# Altium PCB LDC_Module.PcbDoc
Units mm, origin at the board's own origin, x right, y up, seen from the top; angles counter-clockwise.
Board outline 120 x 85 mm, 2 copper layers (Top Layer, Bottom Layer); 14 components, 37 nets, 117 pads, 107 vias.
Unrouted connection lines stored in the file: 35.
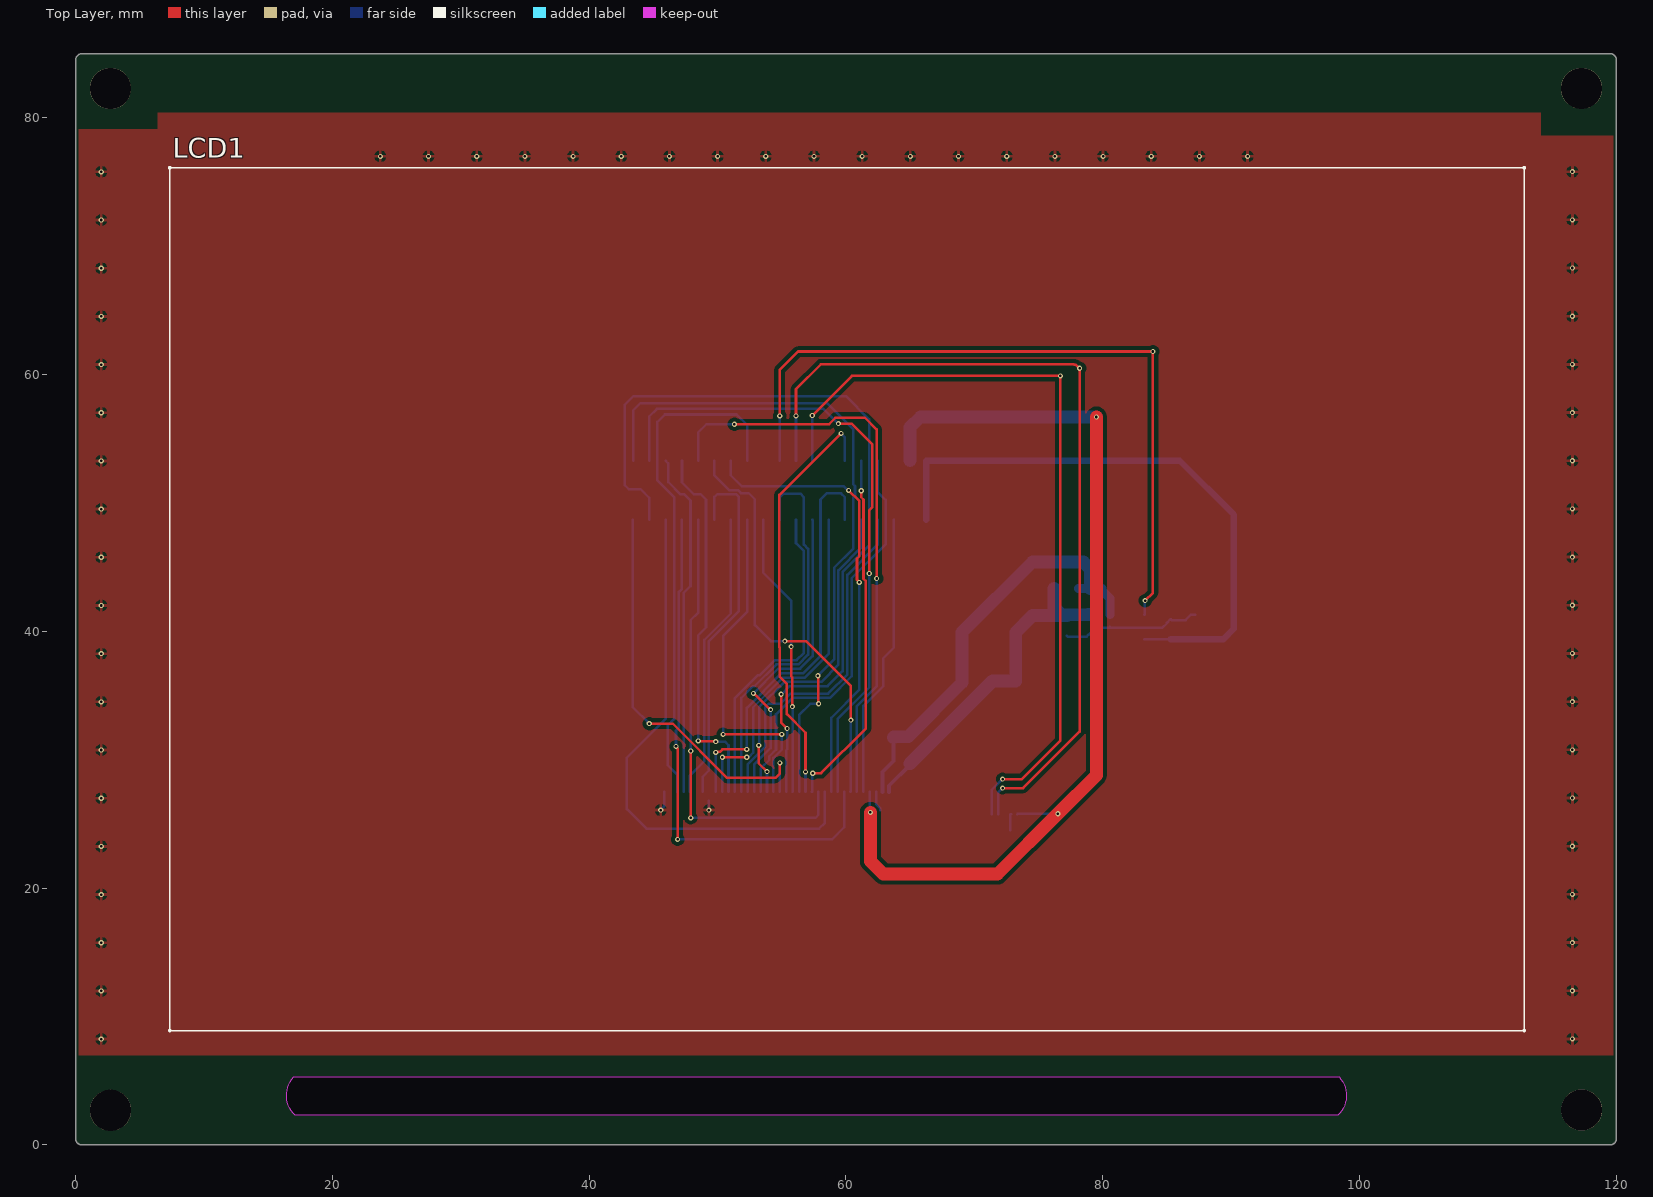
[diagram p0: Top Layer view]
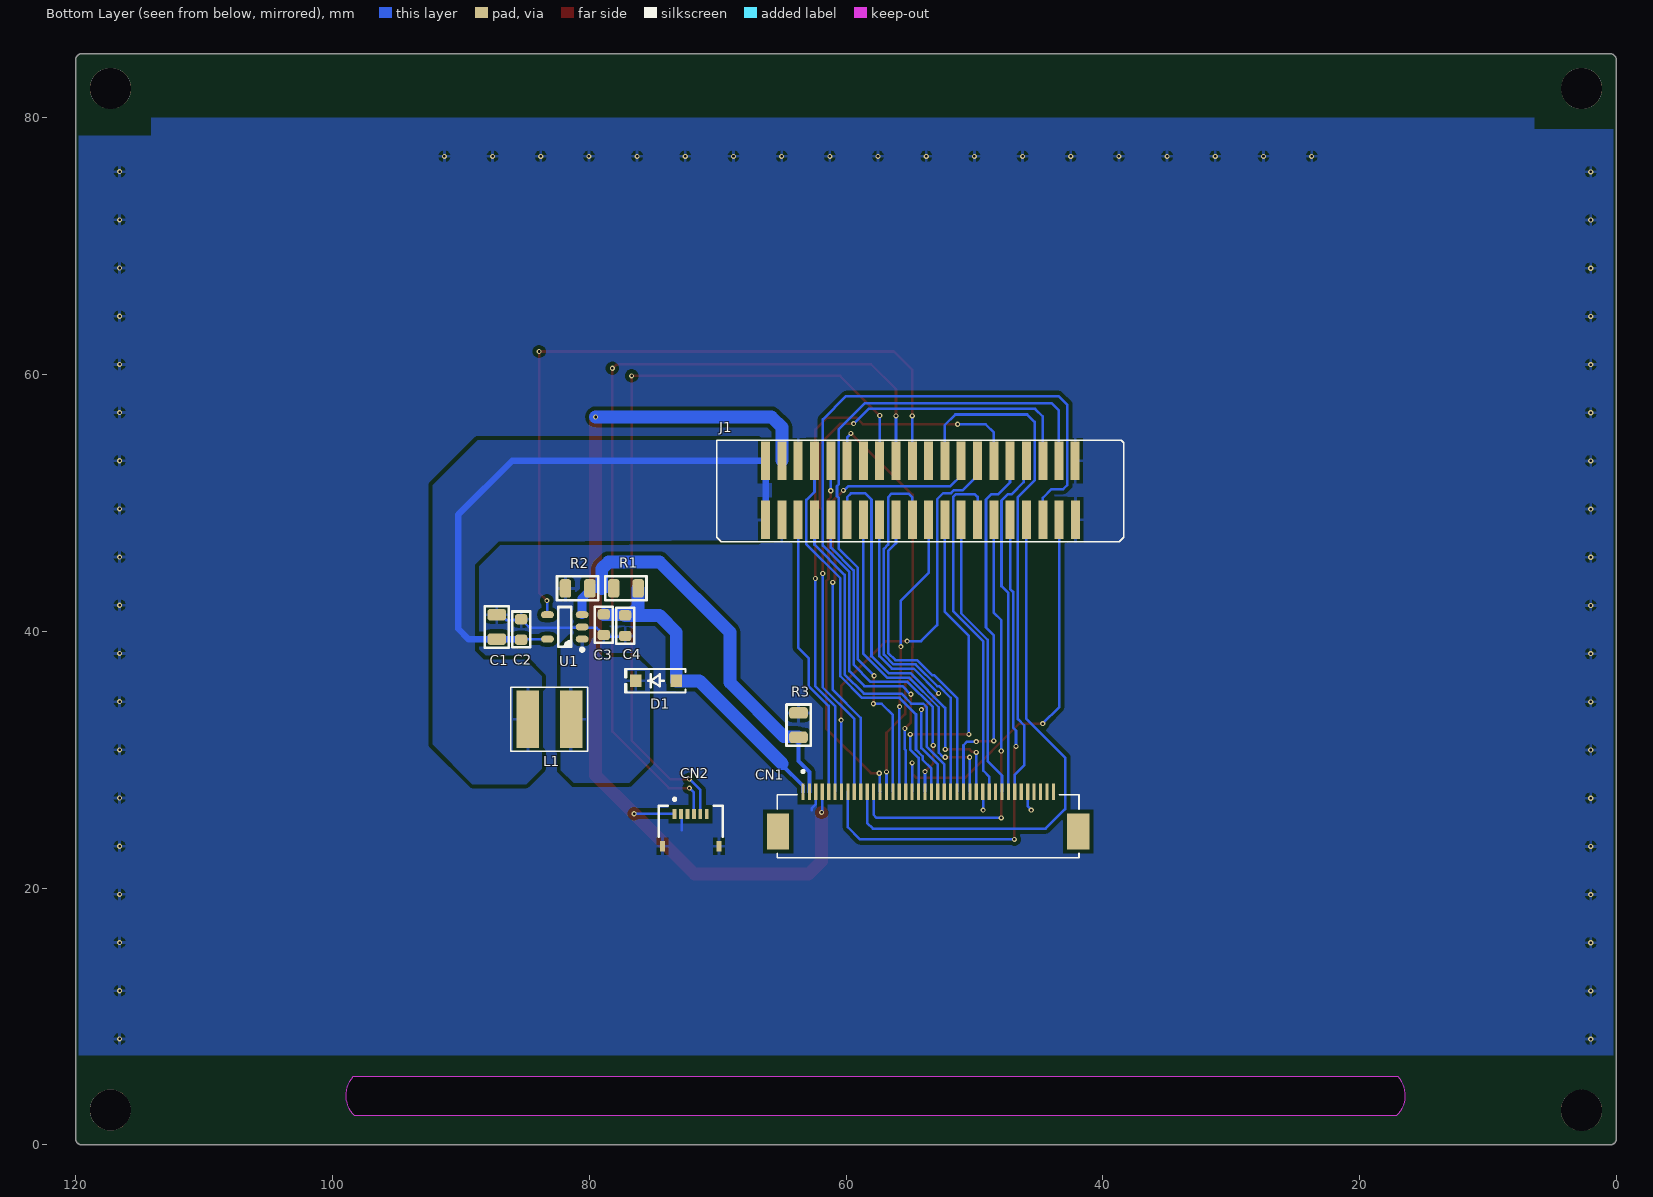
[diagram p1: Bottom Layer view, seen from below]
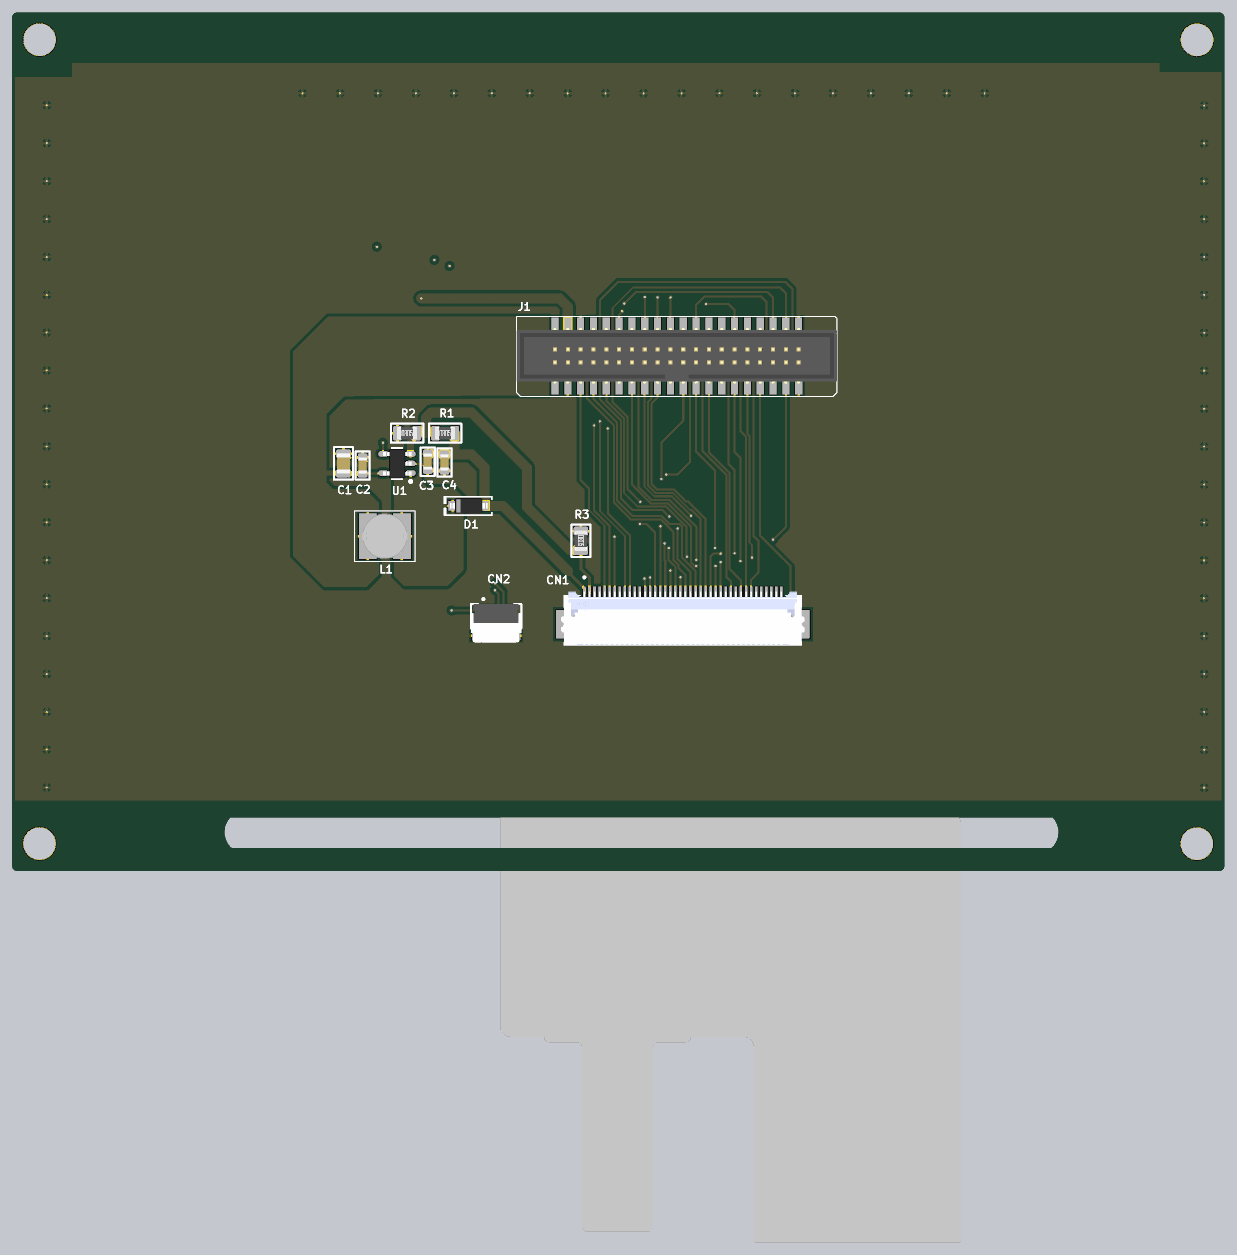
[diagram p2: 3D render of the assembled board from below, using the file's embedded part models]

## Layer stack, top to bottom
Top Solder: solder mask 0.0102, Solder Resist, Dk 3.5
Top Layer: signal copper 0.0356
Dielectric 1: dielectric 0.32, FR-4, Dk 4.8
Bottom Layer: signal copper 0.0356
Bottom Solder: solder mask 0.0102, Solder Resist, Dk 3.5

## Board outline
0,0.5 0,84.5 cw(c0.5,84.5) 0.5,85 119.5,85 cw(c119.5,84.5) 120,84.5 120,0.5 cw(c119.5,0.5) 119.5,0 0.5,0 cw(c0.5,0.5)
cut-out: 17.1,2.3 cw(c18.55,3.85) 17,5.3 98.4,5.3 cw(c96.85,3.85) 98.3,2.3

## Design rules (kind name [scope] priority, off if disabled: settings)
BoardOutlineClearance [All] p1: gap=0.254 ignorepadtopadclearanceinfootprint=FALSE except(0: Arc-SplitContinuation Track-SplitContinuation SMDPad-SplitContinuation THPad-SplitContinuation Via-SplitContinuation Fill-SplitContinuation Poly-SplitContinuation Region-SplitContinuation Text-SplitContinuation)
Clearance gnd [InNet('GND_IN')] p1: gap=0.3 ignorepadtopadclearanceinfootprint=FALSE except(0.127: Track-SMDPad SMDPad-SMDPad)
Clearance [All] p2: gap=0.127 ignorepadtopadclearanceinfootprint=TRUE
HoleSize [All] p1: absolutevalues=TRUE maxlimit=20 minlimit=0.025 maxpercent=80.000 minpercent=20.000
MinimumSolderMaskSliver [All] p1: minsoldermaskwidth=0.025
PolygonConnect [All] p1: connectstyle=Relief reliefconductorwidth=0.254 reliefentries=4 polygonreliefangle="90 Angle" airgapwidth=0.254
RoutingVias [All] p1: holewidth=0.711 width=1.27 viastyle="Through Hole" minholewidth=0.711 minwidth=1.27 maxholewidth=0.711 maxwidth=1.27
SilkToSolderMaskClearance [IsPad] p1: minsilkscreentomaskgap=0.001 clearancetoexposedcopper=TRUE
SolderMaskExpansion [All] p1: expansion=0.102 istentingtop=FALSE
SupplyNets "Schematic Supply Nets_4" [InNet('+5VDC')] p1: voltage=0.000
SupplyNets "Schematic Supply Nets_3" [InNet('LED-K')] p2: voltage=0.000
SupplyNets "Schematic Supply Nets_2" [InNet('GND_IN')] p3: voltage=0.000
SupplyNets "Schematic Supply Nets_1" [InNet('LED-A')] p4: voltage=0.000
SupplyNets "Schematic Supply Nets" [InNet('+3.3VDC')] p5: voltage=0.000
Width [All] p1: maxlimit=1 minlimit=0.127 preferedwidth=0.2
27 further rules are at their usual default settings.

## Classes and differential pairs
net class LTDC_R[0..7]: LTDC_R0 LTDC_R1 LTDC_R2 LTDC_R3 LTDC_R4 LTDC_R5 LTDC_R6 LTDC_R7
net class LTDC_G[0..7]: LTDC_G0 LTDC_G1 LTDC_G2 LTDC_G3 LTDC_G4 LTDC_G5 LTDC_G6 LTDC_G7
net class LTDC_B[0..7]: LTDC_B0 LTDC_B1 LTDC_B2 LTDC_B3 LTDC_B4 LTDC_B5 LTDC_B6 LTDC_B7
component class U_LCD_Power: C1 C2 C3 C4 D1 L1 R1 R2 R3 U1
component class U_LCD_Connectors: CN1 CN2 J1
component class Main: LCD1

## Components (designator, comment, footprint, x,y, rotation, side; value= is the part's Value field where it differs from the comment)
C1 "4u7F/0805/35V" 0805_CAP 87.2,40.35 r270 bottom
C2 "100nF/0603/50V" 0603_CAP 85.3,40.15 r270 bottom
C3 "1uF/0805/35V" 0603_CAP 78.863,40.527 r90 bottom
C4 "100nF/0603/50V" 0603_CAP 77.2,40.45 r90 bottom
CN1 "F32D-1A7Y1-21040" FPC_40POS_DOUBLESIDE 53.6,24.425 r180 bottom locked
CN2 "FFC2B28-06-G" FPC_6POS_DOUBLESIDE 72.1,24.525 r180 bottom
D1 "SS0530_R1_00001" SOD-123 74.8,36.15 r0 bottom
J1 "L-KLS1-202C-40-S-B" L-KLS1-202C-40-T-B 54.2,51 r180 bottom
L1 "10uF" IND(4.5MMX4MM) 83.1,33.15 r180 bottom
LCD1 "FN043AM030" "LCD_4.3\"" 60.075,19.679 r0 top
R1 "1M6/0805/%1" 0805_RES 77.144,43.35 r180 bottom
R2 "150K/0805/%1" 0805_RES 80.9,43.35 r180 bottom
R3 "30R/0805/%1" 0805_RES 63.7,32.7 r270 bottom
U1 "TPS61040DBVR" SOT-23-5 81.9,40.35 r0 bottom

## Footprints (in the part's own frame and the unit in brackets; to place one, negate y for a bottom-side part, rotate by r counter-clockwise, add the part's x,y. Pads: shape width x height; smd on the part's side, far side on the other; paste and mask are expansions set on the pad)
0603_CAP [mm]
  rrect50% 0.8x0.95 smd: 1(-0.8,0) 2(0.8,0)
  silkscreen extent -1.4,-0.7 1.4,0.7, body extent -0.8,-0.41 0.8,0.41, height 0.82
0805_CAP [mm]
  rrect50% 0.9x1.45 smd: 1(-0.95,0) 2(0.95,0)
  silkscreen extent -1.61,-0.93 1.61,0.94, body extent -1,-0.64 1,0.64, height 1.27
0805_RES [mm]
  rrect50% 0.9x1.45 smd: 1(-0.95,0) 2(0.95,0)
  silkscreen extent -1.61,-0.93 1.61,0.94, body extent -1,-0.63 1,0.63, height 0.6
FPC_6POS_DOUBLESIDE [mm]
  rect 0.3x0.8 smd: 1(-1.25,1.25) 2(-0.75,1.25) 3(-0.25,1.25) 4(0.25,1.25) 5(0.75,1.25) 6(1.25,1.25)
  rect 0.4x0.8 smd: S1(-2.2,-1.25) S2(2.2,-1.25)
  silkscreen extent -2.5,-0.5 2.5,2.5, body extent -2.5,-1.9 2.5,1.9, height 1.1
FPC_40POS_DOUBLESIDE [mm]
  rect 0.25x1.3 smd: 1(-9.75,3.08) 2(-9.25,3.08) 3(-8.75,3.08) 4(-8.25,3.08) 5(-7.75,3.08) 6(-7.25,3.08) 7(-6.75,3.08) 8(-6.25,3.08) 9(-5.75,3.08) 10(-5.25,3.08) 11(-4.75,3.08) 12(-4.25,3.08) 13(-3.75,3.08) 14(-3.25,3.08) 15(-2.75,3.08) 16(-2.25,3.08) 17(-1.75,3.08) 18(-1.25,3.08) 19(-0.75,3.08) 20(-0.25,3.08) 21(0.25,3.08) 22(0.75,3.08) 23(1.25,3.08) 24(1.75,3.08) 25(2.25,3.08) 26(2.75,3.08) 27(3.25,3.08) 28(3.75,3.08) 29(4.25,3.08) 30(4.75,3.08) 31(5.25,3.08) 32(5.75,3.08) 33(6.25,3.08) 34(6.75,3.08) 35(7.25,3.08) 36(7.75,3.08) 37(8.25,3.08) 38(8.75,3.08) 39(9.25,3.08) 40(9.75,3.08)
  rect 1.73x2.8 smd: S1(-11.69,0) S2(11.69,0)
  silkscreen extent -11.75,-2.05 11.75,4.75, body extent -12.05,-2.05 12.05,3.27, height 3.21
IND(4.5MMX4MM) [mm]
  rect 1.75x4.5 smd: 1(-1.687,0) 2(1.687,0)
  silkscreen extent -3,-2.5 3,2.5, body extent -2.24,-2.25 2.24,2.25, height 3.2
L-KLS1-202C-40-T-B [mm] "BOX HEADER 40PIN(2x20) 1.27mm SMT V/T MALE BLACK"
  rect 0.7x3 smd: 1(-12.065,-2.3) 2(-12.065,2.3) 3(-10.795,-2.3) 4(-10.795,2.3) 5(-9.525,-2.3) 6(-9.525,2.3) 7(-8.255,-2.3) 8(-8.255,2.3) 9(-6.985,-2.3) 10(-6.985,2.3) 11(-5.715,-2.3) 12(-5.715,2.3) 13(-4.445,-2.3) 14(-4.445,2.3) 15(-3.175,-2.3) 16(-3.175,2.3) 17(-1.905,-2.3) 18(-1.905,2.3) 19(-0.635,-2.3) 20(-0.635,2.3) 21(0.635,-2.3) 22(0.635,2.3) 23(1.905,-2.3) 24(1.905,2.3) 25(3.175,-2.3) 26(3.175,2.3) 27(4.445,-2.3) 28(4.445,2.3) 29(5.715,-2.3) 30(5.715,2.3) 31(6.985,-2.3) 32(6.974,2.3) 33(8.255,-2.3) 34(8.255,2.3) 35(9.525,-2.3) 36(9.525,2.3) 37(10.795,-2.3) 38(10.784,2.3) 39(12.065,-2.3) 40(12.054,2.3)
  silkscreen extent -15.85,-4 15.85,3.9, body extent -15.85,-2.75 15.85,2.75, height 5.6
"LCD_4.3\"" [mm]
  body extent -52.75,-56.44 52.75,56.44, height 6.33
SOD-123 [mm] "SOD, 2-Leads, Body 1.55x3.70mm, IPC Medium Density"
  rect 0.9x0.95 smd: 1(-1.575,0) 2(1.575,0)
  silkscreen extent -2.3,-0.92 2.41,0.92, body extent -1.86,-0.78 1.86,0.77, height 1.35
SOT-23-5 [mm] "SOT23, 5-Leads, Body 2.90x2.80mm, Pitch 0.95mm, IPC Medium Density"
  oval 1x0.55 smd: 1(-1.35,0.95) 2(-1.35,0) 3(-1.35,-0.95) 4(1.35,-0.95) 5(1.35,0.95)
  silkscreen extent -1.47,-1.55 0.5,1.9, body extent -1.44,-1.42 1.39,1.48, height 1.5

## Part data
C1 C2 C3 C4: library part Capacitor
CN1: library part "FPC CONN 40POS", "CONN FFC BOTTOM 40POS 0.5MM R/A", Assembly=., HelpURL=https://www.digikey.com/en/products/detail/amphenol-cs-fci/F32D-1A7Y1-21040/11564657?s=N4IgTCBcDaIGIGYwBEC0BGAggdgJrtTHQAYAWYkAXQF8g, PN=F32D-1A7Y1-21040
CN2: library part "FPC CONN 6POS", Assembly=., HelpURL=https://www.digikey.com/en/products/detail/gct/FFC2B28-06-G/12819956?s=N4IgTCBcDaIGJwMJgEJgBwFoAMA2TA4iALoC%2BQA, PN=FFC2B28-06-G
D1: library part "SCHOTKY DIODE"
J1: library part 2X20, "BOX HEADER 40PIN(2x20) 1.27MM THT V/T MALE BLACK", Assembly=., HelpURL=https://www.ozdisan.com/p/box-headerlar-295/kls-electronic-l-kls1-202c-40-s-b-531010, PN=L-KLS1-202C-40-S-B
L1: library part Inductor, "CR32NP-100KC"
LCD1: "TFT 4.3” 480X272 WITH CTP FT5426", Manufacturer=FANNAL, Help URL=https://www.ozdisan.com/p/tft-paneller-381/fannal-fn043am030-v1-0-535823, MFC PN=FN043AM030
R1 R2 R3: library part RES, Assembly=.
U1: "LED Driver IC 1 Output DC DC Regulator Step-Up (Boost) PWM Dimming 350mA (Switch) SOT-23-5", Manufacturer="Texas Instruments", Assembly=., HelpURL=https://www.digikey.com/en/products/detail/texas-instruments/TPS61040DBVR/454263

## Free pads (board coordinates)
  round 3.2 hole 3.2: 1(2.705,82.281) 1(2.719,2.705) 1(117.281,82.295) 1(117.295,2.719)

## Via types
v1: diameter 0.4, hole 0.2, Top Layer to Bottom Layer, tented both sides, 107 vias

## Nets (pads, with @x,y where several pads share a name; then routed paths per layer and width w, separated by ;. In a path a pad name is that pad's centre, name@x,y a point inside that pad or via, vN(x,y) a via of type N, cw(c..) or ccw(c..) an arc to the next point about the centre after c; other vN are vias at no path point)
+3.3VDC: CN1.4 CN2.1 J1.4 | length 75.1
  Top Layer w1: v1(61.9,25.9) 61.9,22.1 62.9,21.1 71.8,21.1 v1(76.5,25.8) 79.5,28.8 v1(79.5,56.7)
  Bottom Layer w0.2: CN1.4 61.85,26.004 61.9,25.954 v1(61.9,25.9) ; CN2.1 73.375,25.8 v1(76.5,25.8)
  Bottom Layer w1: J1.4 64.995,55.895 65.8,56.7 v1(79.5,56.7)
+5VDC: C1.2 C2.2 J1.1 J1.2 L1.1 U1.5 | length 46.5
  Bottom Layer w0.2: U1.5 83.275,39.375 C2.2@85.275,39.375
  Bottom Layer w0.5: J1.1 J1.2 86,53.3 90.2,49.1 90.2,40.2 89.4,39.4 C1.2 87.175,39.375 C2.2@85.275,39.375
GND_IN: C1.1 C2.1 C3.1 C4.1 CN1.3 CN1.29 CN1.36 CN2.2 CN2.S1 CN2.S2 J1.3 J1.6 J1.39 J1.40 R2.1 R3.1 U1.2 | length 16.1
  Bottom Layer w0.2: v1(45.574,26.086) 45.574,26.14 45.85,26.416 CN1.36 ; v1(49.327,26.086) 49.327,26.822 ; CN1.3 62.35,26.555 62.662,26.243 62.662,26.06 ; 72.8,24.5 72.8,25.775 CN2.2 ; C4.1 77.271,39.579 78.715,39.579 C3.1 78.884,39.727 79.238,40.082 79.238,40.102 79.415,40.28 80.033,40.28 80.036,40.283 80.483,40.283 U1.2 80.617,40.283 81.063,40.283 81.067,40.279 84.629,40.279 84.987,40.637 84.987,40.658 85.279,40.95 C2.1 85.371,40.879 86.458,40.879 86.878,41.3 C1.1
  other v1: 2,8.247 116.576,8.262 2,12 116.576,12.014 2,15.753 116.576,15.767 2,19.505 116.576,19.519 2,23.258 116.576,23.272 2,27.01 116.576,27.024 2,30.763 116.576,30.777 2,34.515 116.576,34.53 2,38.268 116.576,38.282 2,42.02 116.576,42.035 2,45.773 116.576,45.787 2,49.525 116.576,49.54 2,53.278 116.576,53.292 2,57.031 116.576,57.045 2,60.783 116.576,60.797 2,64.536 116.576,64.55 2,68.288 116.576,68.303 2,72.041 116.576,72.055 2,75.793 116.576,75.808 23.732,77 27.485,77 31.237,77 34.99,77 38.742,77 42.495,77 46.247,77 50,77 53.753,77 57.505,77 61.258,77 65.01,77 68.763,77 72.515,77 76.268,77 80.02,77 83.773,77 87.525,77 91.278,77
LCD-PWMCONTROL: J1.20 U1.4 | length 57.5
  Top Layer w0.2: v1(54.835,56.791) 54.835,60.372 56.263,61.8 v1(83.9,61.8) 83.9,43 v1(83.3,42.4)
  Bottom Layer w0.2: J1.20 v1(54.835,56.791) ; U1.4 83.275,41.325 83.275,42.375 v1(83.3,42.4)
LCD_SCL: CN2.5 J1.16 | length 61.3
  Top Layer w0.2: v1(57.375,56.816) 60.459,59.9 v1(76.7,59.9) 76.7,31.5 73.7,28.5 v1(72.2,28.5)
  Bottom Layer w0.2: J1.16 v1(57.375,56.816) ; CN2.5 71.35,27.65 v1(72.2,28.5)
LCD_SDA: CN2.4 J1.18 | length 66.9
  Top Layer w0.2: v1(56.105,56.791) 56.105,58.874 58.039,60.808 77.752,60.808 77.776,60.783 77.863,60.783 78.146,60.5 v1(78.2,60.5) 78.2,32.2 73.8,27.8 v1(72.2,27.8)
  Bottom Layer w0.2: J1.18 v1(56.105,56.791) ; CN2.4 71.85,27.443 72.2,27.793 v1(72.2,27.8)
LED-A: C3.2 C4.2 CN1.1 D1.1 R1.2 | length 26.5
  Bottom Layer w0.3: CN1.1 63.35,27.98 64.973,29.603 64.973,29.69
  Bottom Layer w1: 64.973,29.69 71.433,36.15 D1.1 73.225,39.925 74.55,41.25 C4.2 ; R1.2 76.194,41.886 76.78,41.3 78.835,41.3 C3.2
LED-K: CN1.2 R1.1 R2.2 R3.2 U1.3 | length 33.6
  Bottom Layer w0.3: CN1.2 62.85,29.05 63.7,29.9 R3.2
  Bottom Layer w0.7: R1.1 79.022,43.35 R2.2 ; R2.2@79.95,43.075 80.05,42.975 80.14,42.975 80.55,42.565 U1.3
  Bottom Layer w1: R3.2 63.75,31.8 64.82,31.8 69.037,36.017 69.037,39.929 74.524,45.415 78.486,45.415 79.022,44.879 79.022,43.35
LTDC_B0: CN1.21 J1.8 | length 31.8
  Bottom Layer w0.2: CN1.21 53.35,29.322 54.023,29.995 54.023,30.275 54.547,30.799 54.547,33.542 55.829,34.823 58.75,34.823 60.435,36.508 60.435,44.14 63.081,46.787 63.081,50.245 62.455,50.871 J1.8
LTDC_B1: CN1.22 J1.15 | length 25.2
  Top Layer w0.2: v1(52.789,35.171) 52.825,35.171 54.086,33.91 v1(54.123,33.91)
  Bottom Layer w0.2: v1(52.789,35.171) 54.723,37.106 56.435,37.106 57.404,38.075 57.404,48.671 J1.15 ; CN1.22 52.85,29.634 54.123,30.907 v1(54.123,33.91)
LTDC_B2: CN1.23 J1.7 | length 27.6
  Bottom Layer w0.2: CN1.23 52.35,29.668 53.696,31.013 53.696,34.087 53.975,34.366 54.91,34.366 55.694,35.15 58.615,35.15 60.108,36.643 60.108,44.411 62.455,46.758 J1.7
LTDC_B3: CN1.24 J1.19 | length 30.2
  Bottom Layer w0.2: CN1.24@51.845,27.51 51.845,34.832 52.751,35.737 52.892,35.737 54.588,37.433 56.286,37.433 57.048,38.195 57.048,46.431 56.718,46.761 56.718,50.444 56.439,50.724 55.118,50.724 54.835,50.441 J1.19
LTDC_B4: CN1.25 J1.17 | length 24.8
  Bottom Layer w0.2: CN1.25 51.35,34.799 53.152,36.601 53.294,36.601 54.452,37.76 56.151,37.76 56.721,38.33 56.721,46.253 56.105,46.87 J1.17
LTDC_B5: CN1.26 J1.32 | length 29.2
  Top Layer w0.2: v1(48.489,31.471) 48.514,31.445 49.835,31.445 v1(49.86,31.42)
  Bottom Layer w0.2: J1.32 47.226,51.606 48.133,50.698 48.658,50.698 49.098,50.258 49.098,40.31 48.496,39.708 v1@48.496,31.586 ; v1(49.86,31.42) 50.563,31.42 50.85,31.133 CN1.26
LTDC_B6: CN1.27 J1.13 | length 26.8
  Top Layer w0.2: v1(50.368,30.201) 50.372,30.197 52.269,30.197 v1(52.272,30.194)
  Bottom Layer w0.2: CN1.27 50.359,27.514 50.359,30.192 v1(50.368,30.201) ; v1(52.272,30.194) 52.311,30.232 52.452,30.232 52.776,30.556 52.776,34.092 55.083,36.4 56.796,36.4 58.645,38.249 J1.13
LTDC_B7: CN1.28 J1.11 | length 32.4
  Top Layer w0.2: v1(49.86,30.582) 49.898,30.62 50.184,30.62 50.374,30.81 v1(52.273,30.81)
  Bottom Layer w0.2: CN1.28 49.855,27.51 49.855,30.576 v1(49.86,30.582) ; v1(52.273,30.81) 52.273,34.052 54.948,36.727 56.66,36.727 58.014,38.08 58.014,50.267 58.496,50.749 59.614,50.749 59.915,50.448 J1.11
LTDC_CLK: CN1.30 J1.27 | length 28
  Bottom Layer w0.2: CN1.30 48.85,28.695 49.301,29.146 49.301,39.218 51.664,41.58 51.664,50.47 51.46,50.673 49.962,50.673 49.755,50.466 J1.27
LTDC_DE: CN1.34 J1.24 | length 40.2
  Bottom Layer w0.2: CN1.34 46.85,28.842 46.126,29.566 46.126,32.69 46.609,33.172 46.609,50.465 45.314,51.76 45.314,56.312 45.898,56.896 51.486,56.896 52.324,56.058 52.324,53.329 J1.24
LTDC_G0: CN1.13 J1.10 | length 28
  Top Layer w0.2: v1(57.409,28.957) 58.065,28.957 61.544,32.436 61.544,43.911 61.363,44.092 61.363,50.275 61.189,50.45 v1(61.189,50.952)
  Bottom Layer w0.2: CN1.13 57.375,27.53 57.375,28.923 v1(57.409,28.957) ; v1@61.183,51.007 61.189,51.012 61.189,53.296 J1.10
LTDC_G1: CN1.14 J1.12 | length 33
  Top Layer w0.2: v1(56.845,29.058) 56.845,32.106 55.401,33.55 55.401,35.912 54.839,36.474 54.839,38.76 54.818,38.781 54.818,50.627 v1(59.614,55.423)
  Bottom Layer w0.2: v1(56.845,29.058) 56.848,29.055 56.848,27.507 CN1.14 ; v1(59.614,55.423) 59.614,55.401 59.915,55.1 J1.12
LTDC_G2: CN1.15 J1.38 | length 52.6
  Top Layer w0.2: v1(57.81,36.551) 57.836,36.525 57.836,34.392 v1(57.861,34.366)
  Bottom Layer w0.2: J1.38 43.416,57.208 43.993,57.785 58.522,57.785 60.554,55.753 60.554,51.46 60.699,51.315 60.699,50.539 60.554,50.394 60.554,46.431 59.08,44.958 59.08,37.821 v1(57.81,36.551) ; CN1.15 56.35,33.49 57.226,34.366 v1(57.861,34.366)
LTDC_G3: CN1.16 J1.21 | length 22.1
  Top Layer w0.2: v1(55.728,38.811) 55.728,36.506 55.829,36.404 v1(55.829,34.138)
  Bottom Layer w0.2: J1.21 53.565,44.555 55.728,42.393 v1(55.728,38.811) ; v1(55.829,34.138) 55.84,34.127 55.84,27.515 CN1.16
LTDC_G4: CN1.17 J1.35 | length 64.1
  Top Layer w0.2: v1(54.94,35.103) 54.94,32.908 v1(55.413,32.436)
  Bottom Layer w0.2: J1.35 44.675,50.397 43.993,51.079 43.078,51.079 42.774,51.384 42.774,57.658 43.434,58.318 59.995,58.318 61.798,56.515 61.798,46.68 59.734,44.616 59.734,36.9 58.572,35.738 55.601,35.738 v1@54.966,35.103 ; CN1.17 CN1.17 55.348,30.745 55.428,30.824 55.428,32.42 v1(55.413,32.436)
LTDC_G5: CN1.18 J1.37 | length 31.5
  Top Layer w0.2: v1(44.679,32.817) 46.507,32.817 50.724,28.6 54.508,28.6 54.85,28.942 v1(54.85,29.757)
  Bottom Layer w0.2: J1.37 43.405,34.09 v1(44.679,32.817) ; CN1.18 v1(54.85,29.757)
LTDC_G6: CN1.19 J1.23 | length 26.9
  Top Layer w0.2: v1(50.423,31.979) v1(55.001,31.979)
  Bottom Layer w0.2: v1(50.423,31.979) 50.423,39.653 52.295,41.525 J1.23 ; CN1.19 54.35,30.139 55.011,30.8 55.011,32.009 v1@55.001,32.019
LTDC_G7: CN1.20 J1.9 | length 26.4
  Top Layer w0.2: v1(53.203,31.125) 53.203,29.728 v1(53.848,29.083)
  Bottom Layer w0.2: v1(53.203,31.125) 53.241,31.163 53.241,34.095 55.219,36.073 58.075,36.073 59.407,37.405 59.407,44.752 61.185,46.529 J1.9 ; v1(53.848,29.083) v1(53.848,29.083) 53.849,27.506 CN1.20
LTDC_HSYNC: CN1.32 J1.25 | length 22.5
  Bottom Layer w0.2: CN1.32 47.85,28.775 48.971,29.896 48.971,39.35 51.025,41.404 J1.25
LTDC_R0: CN1.5 J1.5 | length 22.2
  Bottom Layer w0.2: CN1.5 61.35,34.197 62.916,35.763 62.916,37.922 63.729,38.735 63.729,48.696 J1.5
LTDC_R1: CN1.6 J1.30 | length 45.7
  Top Layer w0.2: v1(51.308,56.134) 58.674,56.134 59.182,56.642 61.468,56.642 62.382,55.728 v1@62.382,44.196
  Bottom Layer w0.2: J1.30 48.485,55.495 49.124,56.134 v1(51.308,56.134) ; CN1.6 60.85,34.18 62.382,35.712 v1(62.382,44.12)
LTDC_R2: CN1.7 J1.28 | length 32.6
  Top Layer w0.2: v1(55.245,39.243) 56.896,39.243 60.376,35.763 v1(60.376,33.096)
  Bottom Layer w0.2: J1.28 49.755,52.15 50.905,51 51.596,51 51.821,50.775 52.426,50.775 52.908,50.292 52.908,40.488 54.153,39.243 v1(55.245,39.243) ; CN1.7 60.363,27.518 60.363,33.083 v1(60.376,33.096)
LTDC_R3: CN1.8 J1.31 | length 41.3
  Top Layer w0.2: v1(46.761,31.039) 46.761,30.985 46.888,30.858 v1(46.888,23.8)
  Bottom Layer w0.2: v1(46.761,31.039) 46.761,32.283 46.99,32.512 46.99,43.084 47.215,43.309 J1.31 ; v1(46.888,23.8) 58.903,23.8 59.85,24.747 CN1.8
LTDC_R4: CN1.9 J1.36 | length 50.4
  Top Layer w0.2: v1(59.411,56.185) 60.427,56.185 62.052,54.559 62.052,49.68 61.814,49.442 v1(61.814,44.509)
  Bottom Layer w0.2: J1.36 44.675,56.74 45.263,57.328 58.242,57.328 59.385,56.185 v1(59.411,56.185) ; CN1.9 59.35,33.188 61.814,35.652 v1(61.814,44.509)
LTDC_R5: CN1.10 J1.26 | length 35.7
  Top Layer w0.2: v1(60.198,50.978) 61.036,50.14 61.036,45.855 60.855,45.673 60.855,44.032 61.036,43.851 v1(61.036,43.815)
  Bottom Layer w0.2: J1.26 51.025,52.15 51.867,51.308 59.821,51.308 60.128,51.001 60.207,51.001 60.198,50.992 v1(60.198,50.978) ; CN1.10 58.85,33.272 61.036,35.458 v1@61.036,43.84
LTDC_R6: CN1.11 J1.33 | length 42.5
  Bottom Layer w0.2: J1.33 45.945,33.194 42.926,30.175 42.926,26.162 44.45,24.638 57.912,24.638 58.35,25.076 CN1.11
LTDC_R7: CN1.12 J1.29 | length 35.3
  Top Layer w0.2: v1(47.904,25.476) v1(47.904,30.683)
  Bottom Layer w0.2: v1@47.854,25.476 57.607,25.476 57.85,25.719 CN1.12 ; v1(47.904,30.683) 47.904,40.869 48.485,41.449 J1.29
LTDC_VSYNC: CN1.33 J1.34 | length 27
  Bottom Layer w0.2: J1.34 46.155,53.09 46.155,51.635 47.117,50.673 47.413,50.673 47.89,50.196 47.89,43.521 47.35,42.981 CN1.33
NetD1_2: D1.2 L1.2 U1.1
pads on no net: CN1.31 CN1.35 CN1.37 CN1.38 CN1.39 CN1.40 CN1.S1 CN1.S2 CN2.3 CN2.6 J1.14 J1.22

## Polygon pours and split planes (outlines as drawn)
GND_IN on Bottom Layer "GND_IN_L02_P008" (solid, remove dead copper, pour order 8): 0,7 120,7 120,79.5 ccw(c119.5,79.5) 119.5,80 0.5,80 ccw(c0.5,79.5) 0,79.5
NetD1_2 on Bottom Layer "NONET_L-01_P-001" (solid, pour order 7): 81.2,39.7 82.2,38.7 82.2,29.2 81.2,28.2 76.9,28.2 75.3,29.8 75.3,37 76.3,38 78.9,38 79.5,38.6 79.5,39.4 79.8,39.7
+5VDC on Bottom Layer "NONET_L-01_P-001" (solid, remove dead copper, pour order 6): 65.8,47.1 65.8,54.9 88.7,54.9 92.2,51.4 92.2,31.2 89.1,28.1 84.9,28.1 83.7,29.3 83.7,36.5 85,37.8 88.2,37.8 88.9,38.5 88.9,45.2 87.1,47
GND_IN on Top Layer "NONET_L-01_P-001" (solid, remove dead copper, pour order 9): 0,7 120,7 120,80.4 0,80.4

## Other copper
Bottom Layer:
  pour cut-out: 113.6,0 113.6,5.9 120,5.9 120,0
Multi-Layer:
  pour cut-out: 0,6.4 5.9,6.4 5.9,0 0,0
  pour cut-out: 113.6,0 113.6,5.9 120,5.9 120,0
  pour cut-out: 120,78.6 114.1,78.6 114.1,85 120,85
  pour cut-out: 6.4,85 6.4,79.1 0,79.1 0,85
  pour cut-out: 0,6.4 5.9,6.4 5.9,0 0,0

## Silkscreen, mask and mechanical layers (free items; w line width, h text height)
Top Overlay:
  circle w0.1: c112.825,76.113 r0.085
  circle w0.1: c112.825,8.914 r0.085
  circle w0.1: c7.325,8.913 r0.085
  circle w0.1: c7.325,76.114 r0.085
  lines w0.1: 7.325,76.113 7.325,76.113 ; 7.325,76.113 7.325,8.913 7.325,8.914 112.825,8.914 112.825,76.113 ; 7.325,76.114 112.825,76.114 ; 112.825,76.114 112.825,76.113
Mechanical 1:
  lines w0.1: 0,84.5 cw(c0.5,84.5) 0.5,85 ; 0,84.5 cw(c0.5,84.5) 0.5,85 ; 0,84.5 0,0.5 ccw(c0.5,0.5) 0.5,0 119.5,0 ccw(c119.5,0.5) 120,0.5 120,84.5 ; 0.5,85 119.5,85 ; 119.5,85 cw(c119.5,84.5) 120,84.5 ; 119.5,85 cw(c119.5,84.5) 120,84.5 ; 17,5.3 ccw(c18.55,3.85) 17.1,2.3 98.3,2.3 ccw(c96.85,3.85) 98.4,5.3 17,5.3